# Altium PCB Driver.PcbDoc
Units mil, origin at the board's own origin, x right, y up, seen from the top; angles counter-clockwise.
Board outline 6000 x 4000 mil, 2 copper layers (Top Layer, Bottom Layer); 85 components, 67 nets, 325 pads, 0 vias.
Unrouted connection lines stored in the file: 235.
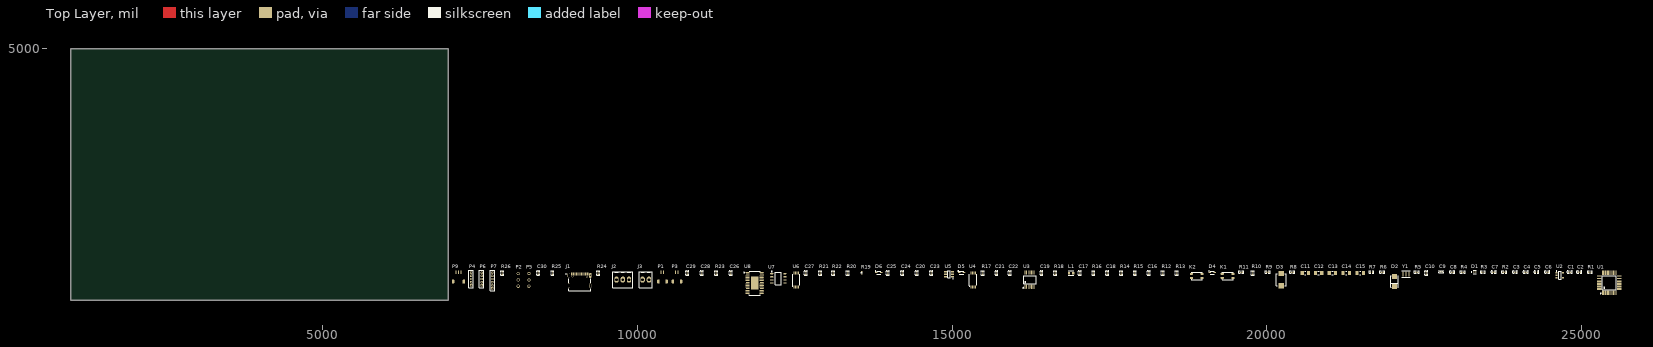
[diagram p0: Top Layer view]
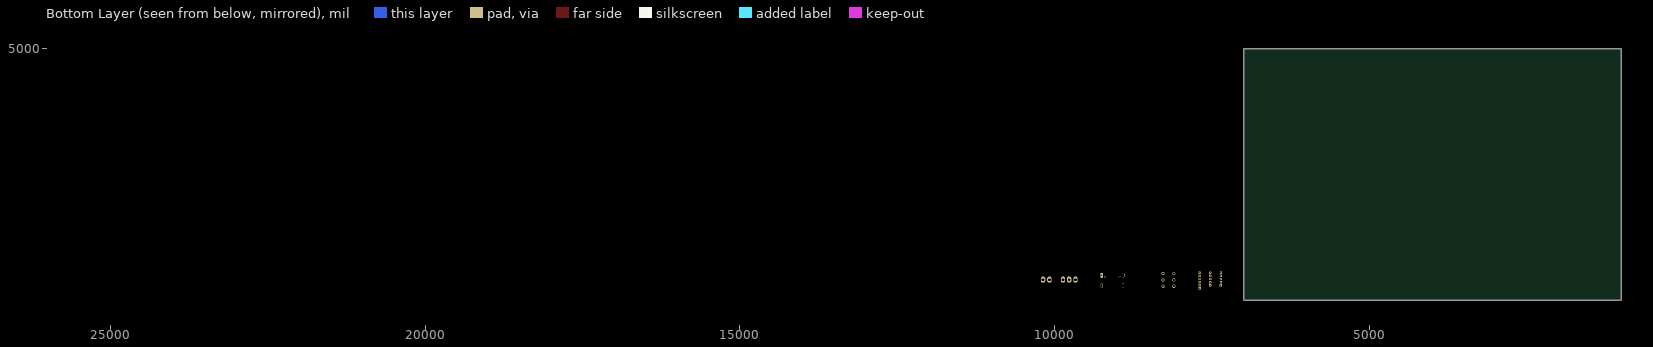
[diagram p1: Bottom Layer view, seen from below]

## Layer stack, top to bottom
Top Solder: solder mask 0.4, Solder Resist, Dk 3.5
Top Layer: signal copper 1.4
Dielectric 1: dielectric 12.6, FR-4, Dk 4.8
Bottom Layer: signal copper 1.4
Bottom Solder: solder mask 0.4, Solder Resist, Dk 3.5

## Board outline
1000,1000 7000,1000 7000,5000 1000,5000

## Design rules (kind name [scope] priority, off if disabled: settings)
Clearance [All] p1: gap=10 ignorepadtopadclearanceinfootprint=FALSE except(0: Arc-Hole Track-Hole SMDPad-Hole THPad-Hole Via-Hole Fill-Hole Poly-Hole Region-Hole Text-Hole)
PolygonConnect [All] p1: connectstyle=Relief reliefconductorwidth=10 reliefentries=4 polygonreliefangle="90 Angle" airgapwidth=10
RoomDefinition Driver [InComponentClass('Driver')] p1: confinementstyle=ConfineIn formatcopy=TRUE lockcomponents=FALSE outline 7045,1065 25640,1065 25640,1585 7045,1585
RoutingVias [All] p1: holewidth=28 width=50 viastyle="Through Hole" minholewidth=28 minwidth=50 maxholewidth=28 maxwidth=50
SolderMaskExpansion [All] p1: expansion=4 istentingtop=FALSE
Width [All] p1: maxlimit=10 minlimit=10 preferedwidth=10
30 further rules are at their usual default settings.

## Components (designator, comment, footprint, x,y, rotation, side; value= is the part's Value field where it differs from the comment)
C1 "0.1uF" 0402_C 24810,1450 r0 top
C2 "10uF" 0402_C 24960,1450 r0 top
C3 "0.1uF" 0402_C 23940,1450 r0 top
C4 "0.1uF" 0402_C 24110,1450 r0 top
C5 "0.1uF" 0402_C 24280,1450 r0 top
C6 "0.1uF" 0402_C 24450,1450 r0 top
C7 "10nF" 0402_C 23600,1450 r0 top
C8 "0.1uF" 0402_C 22940,1450 r0 top
C9 "0.047 µF" "CAP 0402_1005" 22770,1455 r0 top
C10 "10uF" 0402_C 22530,1435 r90 top
C11 "100uF" CAPC3216X190X55LL30T25 20610,1435 r0 top
C12 "100uF" CAPC3216X190X55LL30T25 20820,1435 r0 top
C13 "100uF" CAPC3216X190X55LL30T25 21040,1435 r0 top
C14 "100uF" CAPC3216X190X55LL30T25 21260,1435 r0 top
C15 "100uF" CAPC3216X190X55LL30T25 21480,1435 r0 top
C16 "0.1uF" 0402_C 18125,1435 r90 top
C17 "100pF" 0402_C 17025,1435 r90 top
C18 "0.1uF" 0402_C 17465,1435 r90 top
C19 "0.1uF" 0402_C 16420,1435 r90 top
C20 "0.1uF" 0402_C 14440,1435 r90 top
C21 "0.1uF" 0402_C 15705,1435 r90 top
C22 "10uF" 0402_C 15915,1435 r90 top
C23 "10uF" 0402_C 14670,1435 r90 top
C24 "10uF" 0402_C 14210,1435 r90 top
C25 "10uF" 0402_C 13980,1435 r90 top
C26 "0.1uF" 0402_C 11485,1435 r90 top
C27 "10uF" 0402_C 12675,1435 r90 top
C28 "0.1uF" 0402_C 11025,1435 r90 top
C29 "10nF" 0402_C 10795,1435 r90 top
C30 "470nF" 0402_C 8425,1435 r90 top
D1 "" FP-APHHS1005CGCK-MFG 23300,1450 r0 top
D2 "SS54" SMA(DO-214AC)_S1 22025,1300 r90 top
D3 "SMBJ28CA" FP-SMBJ-CA-MFG 20225,1330 r90 top
D4 "B5819WS-TP" FP-SOD-323-IPC_C 19130,1440 r0 top
D5 "B5819WS-TP" FP-SOD-323-IPC_C 15150,1440 r0 top
D6 "B5819WS-TP" FP-SOD-323-IPC_C 13835,1440 r0 top
J1 "CSP-USC16-TR" VALCON_CSP-USC16-TR 9085,1420 r0 top
J2 "282834-3" "TE 282834-3" 9770,1330 r0 top
J3 "282834-2" "TE 282834-2" 10135,1330 r0 top
K1 "TACT 4P" ButtonTACT_3.5*3.55_90 19375,1390 r0 top value=3.4x3.5
K2 "TACT 4P" ButtonTACT_3.5*3.55_90 18885,1390 r0 top value=3.4x3.5
L1 "6.8uH" FP-LQH2MCN_52-MFG 16890,1435 r0 top
P1 "SH1.0-2P" SH1.0-2P 10400,1445 r0 top
P2 "HDR1x3_2.54" HDR1X3_2.54_180 8110,1425 r0 top
P3 "SH1.0-2P" SH1.0-2P 10630,1445 r0 top
P4 "MHDR1X5" MHDR1X5 7360,1240 r90 top
P5 "HDR1x3_2.54" HDR1X3_2.54_180 8280,1425 r0 top
P6 "MHDR1X5" MHDR1X5 7530,1240 r90 top
P7 "MHDR1X6" MHDR1X6 7700,1190 r90 top
P9 "SH1.0-3P" SH1.0-3P 7160,1445 r0 top
R1 "3.3K" 0402_R 25130,1450 r0 top
R2 "3.3K" 0402_R 23770,1450 r0 top
R3 "3.3K" 0402_R 23430,1450 r0 top
R4 "2K" 0402_R 23110,1450 r0 top
R5 "0R" 0402_R 22380,1450 r0 top
R6 "22R" 0402_R 21830,1450 r0 top
R7 "0R" 0402_R 21660,1450 r0 top
R8 "22R" 0402_R 20400,1450 r0 top
R9 "0R" 0402_R 20010,1450 r0 top
R10 "1.5K" 0402_R 19775,1435 r90 top
R11 "10K" 0402_R 19590,1450 r0 top
R12 "4.7K" 0402_R 18345,1435 r90 top
R13 "4.7K" 0402_R 18565,1435 r90 top
R14 "4.7K" 0402_R 17685,1435 r90 top
R15 "4.7K" 0402_R 17905,1435 r90 top
R16 "10K" 0402_R 17245,1435 r90 top
R17 "1.8K" 0402_R 15485,1435 r90 top
R18 "0.01R" 0402_R 16640,1435 r90 top
R19 "NCP15XH103F03RC" RES_0402 13565,1440 r90 top value=10k
R20 "1M" 0402_R 13345,1435 r90 top
R21 "3.3K" 0402_R 12905,1435 r90 top
R22 "0.01R" 0402_R 13115,1435 r90 top
R23 "120R/NC" 0402_R 11255,1435 r90 top
R24 "10K" 0402_R 9380,1435 r90 top
R25 "5.1K" 0402_R 8655,1435 r90 top
R26 "5.1K" 0402_R 7855,1435 r90 top
U1 "STM32F103CBT6" LQFP-48_7x7x05P 25435,1280 r0 top
U2 "LP2992IM5-3.3/NOPB" DBV0005A_L 24650,1400 r0 top
U3 "AS5048A" TSSOP-14 16235,1330 r0 top
U4 "INA240A2PWR" "SOP65 P640X120-8N" 15335,1325 r90 top
U5 "ME3116AM6G" SOT-23-6 14950,1415 r0 top
U6 "INA240A2PWR" "SOP65 P640X120-8N" 12525,1325 r90 top
U7 "SN65HVD232D" SO-8 12240,1350 r0 top
U8 "DRV8313PWPR" FP-PWP0028C-IPC_B 11865,1275 r0 top
Y1 "8MHz" FP-CSTNE8M00GH5C000R0-MFG 22210,1420 r0 top

## Footprints (in the part's own frame and the unit in brackets; to place one, negate y for a bottom-side part, rotate by r counter-clockwise, add the part's x,y. Pads: shape width x height; smd on the part's side, far side on the other; paste and mask are expansions set on the pad)
0402_C [mm]
  rect 0.6x0.65 smd mask+0.051: 1(-0.425,0) 2(0.425,0)
  silkscreen extent -0.97,-0.58 0.97,0.58, body extent -0.48,-0.3 0.52,0.3, height 0.2
0402_R [mm]
  rect 0.6x0.65 smd mask+0.051: 1(-0.425,0) 2(0.425,0)
  silkscreen extent -0.97,-0.58 0.97,0.58, body extent -0.57,-0.27 0.58,0.28, height 0.41
ButtonTACT_3.5*3.55_90 [mil]
  rrect50% 50x30 smd: 1(-85,32) 2(-85,-32) 3(85,32) 4(85,-32)
  silkscreen extent -91,-59 91,59, body extent -90,-55 91,85, height 56
"CAP 0402_1005" [mm] "Chip Capacitor, 2-Leads, Body 1.02x0.51mm, IPC Medium Density"
  rect 0.6x0.64 smd: 1(-0.44,0) 2(0.44,0)
  silkscreen extent -1,-0.5 1,0.5, body extent -0.5,-0.26 0.5,0.26, height 0.52
CAPC3216X190X55LL30T25 [mm] "Chip Capacitor, 2-Leads, Body 3.5x1.9mm, IPC High Density"
  rect 1.25x1.8 smd: 1(-1.275,0) 2(1.275,0)
  silkscreen extent -0.25,-0.8 0.25,0.8, body extent -1.75,-0.95 1.75,0.95, height 1.9
DBV0005A_L [mm] "SOT23, 5-Leads, Body 3.05x1.75mm, Pitch 0.95mm, IPC High Density"
  rrect18% 0.8x0.55 smd: 1(-1.275,0.95) 2(-1.275,0) 3(-1.275,-0.95) 4(1.275,-0.95) 5(1.275,0.95)
  silkscreen extent -1.4,-1.55 0.5,1.9, body extent -1.42,-1.46 1.42,1.46, height 1.08
FP-APHHS1005CGCK-MFG [mm]
  rect 0.7x0.5 smd paste+0 mask+0: 1(-0.45,0) 2(0.45,0)
  silkscreen extent -1.47,-0.63 0.55,0.65, body extent -0.9,-0.4 0.9,0.4, height 0.25
FP-CSTNE8M00GH5C000R0-MFG [mm]
  rect 0.4x1.9 smd paste+0 mask+0: 1(1.2,0) 2(0,0) 3(-1.2,0)
  silkscreen extent -1.68,-1.35 1.68,1.35, body extent -1.78,-1.05 1.78,1.05, height 0.25
FP-LQH2MCN_52-MFG [mm]
  rect 0.9x1 smd paste+0 mask+0: 1(-0.85,0) 2(0.85,0)
  silkscreen extent -1.1,-0.9 1.1,0.9, body extent -1.4,-1 1.4,1, height 0.25
FP-PWP0028C-IPC_B [mm]
  rect 1.655x0.381 smd paste+0 mask+0: 1(-2.825,4.225)
  rrect100% 1.655x0.381 smd paste+0 mask+0: 2(-2.825,3.575) 3(-2.825,2.925) 4(-2.825,2.275) 5(-2.825,1.625) 6(-2.825,0.975) 7(-2.825,0.325) 8(-2.825,-0.325) 9(-2.825,-0.975) 10(-2.825,-1.625) 11(-2.825,-2.275) 12(-2.825,-2.925) 13(-2.825,-3.575) 14(-2.825,-4.225) 15(2.825,-4.225) 16(2.825,-3.575) 17(2.825,-2.925) 18(2.825,-2.275) 19(2.825,-1.625) 20(2.825,-0.975) 21(2.825,-0.325) 22(2.825,0.325) 23(2.825,0.975) 24(2.825,1.625) 25(2.825,2.275) 26(2.825,2.925) 27(2.825,3.575) 28(2.825,4.225)
  rect 3.1x5.18 smd paste-1000 mask+0: 29(0,0)
  silkscreen extent -4.35,-4.85 2.2,4.85, body extent -3.9,-5.1 3.9,5.1, height 0.25
FP-SMBJ-CA-MFG [mm]
  rect 2.16x2.26 smd paste+0 mask+0: 1(-2.45,0) 2(2.45,0)
  silkscreen extent -2.37,-1.97 2.37,1.97, body extent -3.63,-2.07 3.63,2.07, height 0.25
FP-SOD-323-IPC_C [mil]
  rect 41.54x17.16 smd paste+0 mask+0: 1(-38.41,0)
  rrect100% 41.54x17.16 smd paste+0 mask+0: 2(38.41,0)
  silkscreen extent -57,-26 33,33, body extent -63,-29 63,29, height 10
HDR1X3_2.54_180 [mil]
  round 50 hole 32: 1(0,0) 2(0,-100) 3(0,-200)
  body extent -49,-250 49,50, height 323
LQFP-48_7x7x05P [mm]
  oval 0.28x1.8 smd mask+0.051: 1(-2.75,-4.05) 2(-2.25,-4.05) 3(-1.75,-4.05) 4(-1.25,-4.05) 5(-0.75,-4.05) 6(-0.25,-4.05) 7(0.25,-4.05) 8(0.75,-4.05) 9(1.25,-4.05) 10(1.75,-4.05) 11(2.25,-4.05) 12(2.75,-4.05) 25(2.75,4.05) 26(2.25,4.05) 27(1.75,4.05) 28(1.25,4.05) 29(0.75,4.05) 30(0.25,4.05) 31(-0.25,4.05) 32(-0.75,4.05) 33(-1.25,4.05) 34(-1.75,4.05) 35(-2.25,4.05) 36(-2.75,4.05)
  oval 1.8x0.28 smd mask+0.051: 13(4.05,-2.75) 14(4.05,-2.25) 15(4.05,-1.75) 16(4.05,-1.25) 17(4.05,-0.75) 18(4.05,-0.25) 19(4.05,0.25) 20(4.05,0.75) 21(4.05,1.25) 22(4.05,1.75) 23(4.05,2.25) 24(4.05,2.75) 37(-4.05,2.75) 38(-4.05,2.25) 39(-4.05,1.75) 40(-4.05,1.25) 41(-4.05,0.75) 42(-4.05,0.25) 43(-4.05,-0.25) 44(-4.05,-0.75) 45(-4.05,-1.25) 46(-4.05,-1.75) 47(-4.05,-2.25) 48(-4.05,-2.75)
  silkscreen extent -3.6,-4.42 2.75,2.75, body extent -4.5,-4.5 4.5,4.5, height 1.6
MHDR1X5 [mm] "Connector; Header; 5 Position"
  rect 1x1 hole 0.6: 1(0,0)
  round 1 hole 0.6: 2(1.27,0) 3(2.54,0) 4(3.81,0) 5(5.08,0)
  silkscreen extent -0.9,-0.9 5.98,0.9
MHDR1X6 [mm] "Connector; Header; 6 Position"
  rect 1x1 hole 0.6: 1(0,0)
  round 1 hole 0.6: 2(1.27,0) 3(2.54,0) 4(3.81,0) 5(5.08,0) 6(6.35,0)
  silkscreen extent -0.9,-0.9 7.25,0.9
RES_0402 [mil]
  rrect50% 20x20 smd: 1(-20,0) 2(20,0)
  silkscreen extent -7,-10 7,10, body extent -20,-10 20,10, height 14
SH1.0-2P [mm]
  rrect50% 0.4x1.5 smd: 1(-0.5,0) 2(0.5,0)
  rrect50% 1x1.5 smd: SH1(-1.651,-3.683) SH2(1.651,-3.683)
  body extent -2,-4.42 2,0.54, height 3.06
SH1.0-3P [mm]
  rrect50% 0.4x1.5 smd: 1(-1,0) 2(0,0) 3(1,0)
  rrect50% 1x1.5 smd: SH1(-2.159,-3.683) SH2(2.159,-3.683)
  body extent -2.5,-4.42 2.5,0.54, height 3.06
SMA(DO-214AC)_S1 [mm]
  rect 2x2 smd: 1(2.1,0) 2(-2.1,0)
  silkscreen extent -2.35,-1.5 2.35,1.5, body extent -2.6,-1.3 2.6,1.3, height 2.4
SO-8 [mm]
  oval 1.3x0.5 smd: 1(-2.65,1.905) 2(-2.65,0.635) 3(-2.65,-0.635) 4(-2.65,-1.905) 5(2.65,-1.905) 6(2.65,-0.635) 7(2.65,0.635) 8(2.65,1.905)
  silkscreen extent -2.77,-2.5 1.2,2.93, body extent -2.89,-2.44 2.89,2.46, height 1.45
"SOP65 P640X120-8N" [mm]
  rrect25% 1.27x0.381 smd: 1(-2.87,0.975) 2(-2.87,0.325) 3(-2.87,-0.325) 4(-2.87,-0.975) 5(2.87,-0.975) 6(2.87,-0.325) 7(2.87,0.325) 8(2.87,0.975)
  silkscreen extent -2.64,-1.5 2.2,1.62, body extent -3.2,-1.5 3.2,1.5, height 1.2
SOT-23-6 [mm]
  rect 1.1x0.6 smd: 1(1.4,-0.95) 2(1.4,0) 3(1.4,0.95) 4(-1.4,0.95) 5(-1.4,0) 6(-1.4,-0.95)
  silkscreen extent -0.5,-1.87 1.73,1.4, body extent -1.4,-1.4 1.4,1.5, height 1.18
"TE 282834-2" [mm]
  oval 1.75x2.5 hole 1.1: 1(-1.27,0) 2(1.27,0)
  silkscreen extent -2.7,-3.2 2.7,3.2, body extent -2.77,-3.25 2.77,3.25, height 10
"TE 282834-3" [mm]
  oval 1.75x2.5 hole 1.1: 1(-2.54,0) 2(0,0) 3(2.54,0)
  silkscreen extent -3.97,-3.2 3.97,3.2, body extent -4.04,-3.25 4.04,3.25, height 10
TSSOP-14 [mm]
  oval 0.32x1.7 smd: 1(-1.95,-2.85) 2(-1.3,-2.85) 3(-0.65,-2.85) 4(0,-2.85) 5(0.65,-2.85) 6(1.3,-2.85) 7(1.95,-2.85) 8(1.95,2.85) 9(1.3,2.85) 10(0.65,2.85) 11(0,2.85) 12(-0.65,2.85) 13(-1.3,2.85) 14(-1.95,2.85)
  silkscreen extent -2.85,-3.45 2.55,1.6, body extent -2.5,-3.2 2.5,3.2, height 1.2
VALCON_CSP-USC16-TR [mm]
  rect 0.3x1.14 smd: A1(-3.35,0) A4(-2.55,0) A5(-1.25,0) A6(-0.25,0) A7(0.25,0) A8(1.25,0) A9(2.55,0) A12(3.35,0) B1(3.05,0) B4(2.25,0) B5(1.75,0) B6(0.75,0) B7(-0.75,0) B8(-1.75,0) B9(-2.25,0) B12(-3.05,0)
  oval 1x2 hole 0.65 slot 1.72 at 90 deg: S1(-4.325,-0.59)
  oval 1x2 hole 0.65: S2(4.325,-0.59)
  oval 0.9x1.8 hole 0.65 slot 1.4 at 90 deg: S3(-4.325,-4.77) S4(4.325,-4.77)
  round 0.65 hole 0.65 unplated: ""(-2.89,-1.07) ""(2.89,-1.07)
  silkscreen extent -5.67,-6.86 4.47,0.1, body extent -4.47,-6.28 4.47,1.47, height 3.26

## Part data
C1 C2 C3 C4 C5 C6 C7 C8 C10 C16 C18 C19 C20 C21 C22 C23 C24 C25 C26 C27 C28: library part "0402 100nF (104) 10% 16V", "贴片电容", Package=0402, SuppliersPartNumber=C1525, ComponentLink1Description=供应商链接, ComponentLink1URL=http://www.szlcsc.com/product/details_1877.html, Supplier=LC
C9: library part C0402C473K3REC7867, "CAP CER 0402 47NF 25V X7R 10%", Device Package="0402 (1005 Metric)", manufacturer=KEMET, Operating Temperature="-55°C ~ 125°C", Supplier Part Number 1=399-C0402C473K3REC7867CT-ND, Temperature Coefficient=X7R, Tolerance=±10%, Voltage - Rated=25V, Applications="ESD Protection", Capacitance="0.047 µF", ComponentLink1Description=Datasheet, ComponentLink1URL=https://api.kemet.com/component-edge/download/datasheet/C0402C473K3REC7867.pdf, componentlink2description="DigiKey Link", componentlink2url=https://www.digikey.com/en/products/detail/kemet/C0402C473K3REC7867/8643594, lastupdated="2022/8/26 11:23:32", Lifecycle Status=Active, Minimum Order=1, Mounting Type="Surface Mount, MLCC", Package / Case="0402 (1005 Metric)", packaging=TapeAndReel, Part Number=C0402C473K3REC7867, Part Status=Active, partid=33555, price=0.01, series="ESD SMD Comm X7R", Size / Dimension="0.039\" L x 0.020\" W (1.00mm x 0.50mm)", Supplier 1=DigiKey, Thickness (Max)="0.022\" (0.55mm)"
C11 C12 C13 C14 C15: library part CMP-1662-00011-2, "Chip Capacitor, 100 uF, +/- 20%, 6.3 V, -55 to 85 degC, 1206 (3216 Metric), RoHS, Tape and Reel", Capacitance="100 uF", Case Code (Imperial)=1206, Case Code (Metric)=3216, Max Operating Temperature="85 degC", Min Operating Temperature="-55 degC", Package Quantity=2000, PartNumber=GRM31CR60J107ME39L, Tolerance=20%, Type (Capacitors)=X5R, Voltage Rating="6.3 V", Case\/Package=1206, ComponentLink1Description="Manufacturer URL", ComponentLink1URL=http://www.murata.com/, componentlink2description=Datasheet, componentlink2url=http://psearch.en.murata.com/capacitor/product/GRM31CR60J107ME39%23.pdf, DatasheetVersion=09/2016, Height="1.6 mm", Length="3.2 mm", Mount="Surface Mount", Mounting Technology="Surface Mount", PackageDescription="2-Pin Surface Mount Device, Body 3.2 x 1.6 mm", PackageReference=1206, packaging="Tape and Reel", Pins=2, Radiation Hardening=No, REACH SVHC="No SVHC", RoHSCompliant=true, Voltage Rating (DC)="6.3 V", Width="1.6 mm"
C17: library part "0402 100pF (101) 5% 50V", "贴片电容", Package=0402, SuppliersPartNumber=C1546, ComponentLink1Description=供应商链接, ComponentLink1URL=http://www.szlcsc.com/product/details_1898.html, Supplier=LC
C29: library part "0402 10nF (103) 10% 50V", "贴片电容", Package=0402, SuppliersPartNumber=C15195, ComponentLink1Description=供应商链接, ComponentLink1URL=http://www.szlcsc.com/product/details_15869.html, Supplier=LC
C30: library part "0402 470nF (474) 10% 10V", "贴片电容", Package=0402, SuppliersPartNumber=C47339, ComponentLink1Description=供应商链接, ComponentLink1URL=http://www.szlcsc.com/product/details_48344.html, Supplier=LC
D1: library part CMP-44529-000044-1, "LED GREEN CLEAR CHIP SMD", Case Code (Imperial)=0402, Case Code (Metric)=1005, Color=Green, Forward Current=20mA, Forward Voltage=2.1V, Lens Color=Clear, Max Operating Temperature=85°C, Min Operating Temperature=-40°C, Package Quantity=2000, Case/Package=0402, Dominant Wavelength=570nm, Height=0.6mm, Illumination Color=Green, Lead Free="Lead Free", Length=1mm, Lens Style=Clear, Luminous Intensity=50mcd, Mount="Surface Mount", Number of LEDs=1, Number of Pins=2, packaging="Tape and Reel", Test Current=20mA, Viewing Angle=120°, Wavelength=570nm, Width=0.5mm
D2: library part "SMA(DO-214AC) SS54", "二极管", Package=SMA(DO-214AC), SuppliersPartNumber=C22452, ComponentLink1Description=供应商链接, ComponentLink1URL=http://www.szlcsc.com/product/details_23178.html, Supplier=LC
D3: library part CMP-08607-000057-1, "TVS DIODE 28V 45.4V DO214AA", Breakdown Voltage=31.1V, Clamping Voltage=45.4V, manufacturer="Littelfuse Inc", Max Junction Temp=+150°C, Package=SMBJ-CA, Peak Pulse Current=13.3A, Peak Pulse Power=600W, Reverse Standoff Voltage=28V, Temperature="-65°C to +150°C", Temperature Range Low=-65°C, Automotive=No, Category=Diode, componentlink2description=Datasheet, componentlink2url=https://www.littelfuse.com/~/media/electronics/datasheets/tvs_diodes/littelfuse_tvs_diode_smbj_datasheet.pdf.pdf, Device Class L1="Circuit Protection", Device Class L2="TVS Diodes", Device Class L3=unset, Digikey Description="TVS DIODE 28V 45.4V DO214AA", Direction=Bidirectional, Height=2.61mm, Lead Free=Yes, Manufacturer Part Number=SMBJ28CA, Mouser Description="In a Pack of 10, Littelfuse SMBJ28CA, Bi-Directional TVS Diode, 600W, 2-Pin DO-214AA", Number Of Channels=1, Octopart=https://octopart.com/smbj28ca-littelfuse-350757, RoHS=TRUE, Temperature Range High=+150°C
D4 D5 D6: library part CMP-56206-000009-1, "DIODE SCHOTTKY 40V 1A SOD323", Average Rectified Current=1A, Forward Voltage=900mV, Max Operating Temperature=125°C, Max Reverse Leakage Current=1mA, Max Reverse Voltage (DC)=40V, Max Surge Current=10A, Min Operating Temperature=-65°C, Package Quantity=1, Element Configuration=Single, Lead Free="Lead Free", Mount="Surface Mount", Number of Pins=2, packaging="Tape and Reel", Peak Non-Repetitive Surge Current=10A, Radiation Hardening=No, RoHS Compliant=Yes, series=-
J1: "CSP-USC16-TR Valcon USB Type C Surface Mount PCB Socket", Package=None, Availability="No availability data", Check_prices=https://www.snapeda.com/parts/CSP-USC16-TR/Valcon/view-part/4783629/?ref=eda, MF=Valcon, MP=CSP-USC16-TR, price=None, Purchase-URL=https://pricing.snapeda.com/search/part/CSP-USC16-TR/?ref=eda, SnapEDA_Link=https://www.snapeda.com/parts/CSP-USC16-TR/Valcon/view-part/4783629/?ref=snap
J2: "TERM BLK 3P SIDE ENT 2.54MM PCB", Color=Green, Current=10A, manufacturer="TE Connectivity AMP Connectors", Supplier Part Number 1=A98334-ND, Voltage=150V, ComponentLink1Description=Datasheet, ComponentLink1URL=https://www.te.com/commerce/DocumentDelivery/DDEController?Action=srchrtrv&DocNm=282834&DocType=Customer+Drawing&DocLang=English, componentlink2description="DigiKey Link", componentlink2url=http://digikey.com/product-detail/en/te-connectivity-amp-connectors/282834-3/A98334-ND/1153264, lastupdated="2020/1/15 4:15:50", Lifecycle Status=Active, Mating Orientation="Horizontal with Board", Minimum Order=1, Mounting Type="Through Hole", Number of Levels=1, packaging=Bulk, Part Number=282834-3, Part Status=Active, Pitch="0.100\" (2.54mm)", Positions Per Level=3, price=2.01, series=Buchanan, Supplier 1=DigiKey, Wire Gauge="16-30 AWG", Wire Termination="Screw - Rising Cage Clamp"
J3: "TERM BLK 2P SIDE ENT 2.54MM PCB", Color=Green, Current=10A, manufacturer="TE Connectivity AMP Connectors", Supplier Part Number 1=A98333-ND, Voltage=150V, ComponentLink1Description=Datasheet, ComponentLink1URL=https://www.te.com/commerce/DocumentDelivery/DDEController?Action=srchrtrv&DocNm=282834&DocType=Customer+Drawing&DocLang=English, componentlink2description="DigiKey Link", componentlink2url=http://digikey.com/product-detail/en/te-connectivity-amp-connectors/282834-2/A98333-ND/1150135, lastupdated="2020/1/15 4:15:38", Lifecycle Status=Active, Mating Orientation="Horizontal with Board", Minimum Order=1, Mounting Type="Through Hole", Number of Levels=1, packaging=Bulk, Part Number=282834-2, Part Status=Active, Pitch="0.100\" (2.54mm)", Positions Per Level=2, price=0.88, series=Buchanan, Supplier 1=DigiKey, Wire Gauge="16-30 AWG", Wire Termination="Screw - Rising Cage Clamp"
K1 K2: library part ButtonTACT, "Button", type="TACT 4P"
L1: library part CMP-06042-015166-1, "Wire Wound Ferrite Inductor for Power Lines 6.8μH ±20% 1.6Ω 285mA 0806", Case Code (Imperial)=0806, Case Code (Metric)=2016, Current Rating=285mA, DC Resistance (DCR)=1.6R, Max Operating Temperature=85°C, Min Operating Temperature=-40°C, Package Quantity=3000, Resistor Type=Wirewound, Self Resonant Frequency=65MHz, Test Frequency=1MHz, Tolerance=20%, Case/Package=0806, Core Material=Ferrite, DC Current=285mA, Depth=1.8mm, Height=0.9mm, Height - Seated (Max)=0.037inch, Inductance=6.8uH, Length=2mm, Max DC Current=285mA, Military Standard=Not, Mount="Surface Mount", packaging="Tape and Reel", Radiation Hardening=No, Shielding=Unshielded, Termination=SMD/SMT, Weight=0.000317oz, Width=0.063inch
P2 P5 P9: "Header"
P4 P6: "Header, 5-Pin", LatestRevisionDate=17-Jul-2002, LatestRevisionNote="Re-released for DXP Platform.", Publisher="Altium Limited"
P7: "Header, 6-Pin", LatestRevisionDate=17-Jul-2002, LatestRevisionNote="Re-released for DXP Platform.", Publisher="Altium Limited"
R1 R2 R3 R21: library part "0402 3.3KΩ (3301) 1%", "贴片电阻", Package=0402, SuppliersPartNumber=C25890, ComponentLink1Description=供应商链接, ComponentLink1URL=http://www.szlcsc.com/product/details_26633.html, Supplier=LC
R4 R20: library part "0402 2KΩ (2001) 1%", "贴片电阻", Package=0402, SuppliersPartNumber=C4109, ComponentLink1Description=供应商链接, ComponentLink1URL=http://www.szlcsc.com/product/details_4516.html, Supplier=LC
R5 R7 R9: library part "0402 0Ω (0R0) 1%", "贴片电阻", Package=0402, SuppliersPartNumber=C17168, ComponentLink1Description=供应商链接, ComponentLink1URL=http://www.szlcsc.com/product/details_17853.html, Supplier=LC
R6 R8 R18 R22: library part "0402 22Ω (22R0) 1%", "贴片电阻", Package=0402, SuppliersPartNumber=C25092, ComponentLink1Description=供应商链接, ComponentLink1URL=http://www.szlcsc.com/product/details_25835.html, Supplier=LC
R10: library part "0402 1.5KΩ (1501) 1%", "贴片电阻", Package=0402, SuppliersPartNumber=C25867, ComponentLink1Description=供应商链接, ComponentLink1URL=http://www.szlcsc.com/product/details_26610.html, Supplier=LC
R11: library part "0402 10KΩ (1002) 1%", "贴片电阻", Package=0402, SuppliersPartNumber=C25744, ComponentLink1Description=供应商链接, ComponentLink1URL=http://www.szlcsc.com/product/details_26487.html, Supplier=LC
R12 R13 R14 R15: library part "0402 4.7KΩ (4701) 1%", "贴片电阻", Package=0402, SuppliersPartNumber=C25900, ComponentLink1Description=供应商链接, ComponentLink1URL=http://www.szlcsc.com/product/details_26643.html, Supplier=LC
R16 R17 R24 R25 R26: library part "0402 1.2KΩ (1201) 1%", "贴片电阻", Package=0402, SuppliersPartNumber=C25862, ComponentLink1Description=供应商链接, ComponentLink1URL=http://www.szlcsc.com/product/details_26605.html, Supplier=LC
R19: "THERMISTOR 10K OHM NTC 0402 SMD"
R23: library part "0402 120Ω (1200) 1%", "贴片电阻", Package=0402, SuppliersPartNumber=C25079, ComponentLink1Description=供应商链接, ComponentLink1URL=http://www.szlcsc.com/product/details_25822.html, Supplier=LC
U1: "ARM", Package=LQFP-48_7x7x05P, SuppliersPartNumber=C8304, ComponentLink1Description=供应商链接, ComponentLink1URL=http://www.szlcsc.com/product/details_8796.html, Supplier=LC
U2: library part CMP-0062-02175-3, "Micropower 250 mA Low-Noise Ultra Low-Dropout Regulator, 5-pin SOT-23, Pb-Free", manufacturer="Texas Instruments", PackageTopMarking=LFEB*XTT, PowerWise=N, ComponentLink1Description="Datasheet URL", ComponentLink1URL=http://www.ti.com/general/docs/lit/getliterature.tsp?genericPartNumber=LP2992&fileType=pdf, CompType="LDO IC", PackageDescription="Molded SOT-23, .115 x .063 x .040 in Body, 5 Lead, .0375 in Pitch", PackageReference=DBV0005A, PinCount=5, RoHS=Y
U3: "14 位旋转式位置传感器"
U4 U6: "-4 to 80V, bidirectional, ultra-precise current sense amplifier with enhanced PWM rejection 8-TSSOP -40 to 125", Package="TSSOP-8 Texas Instruments", Availability=Good, MF="Texas Instruments", MP=INA240A2PWR, price=None, Purchase-URL=https://pricing.snapeda.com/search/part/INA240A2PWR/?ref=eda, SnapEDA_Link=https://www.snapeda.com/parts/INA240A2PWR/Texas%20Instruments/view-part/588604/?ref=snap
U5: "DC/DC降压型稳压器"
U7: manufacturer="Texas Instruments", Manufacturer Part Number=SN65HVD232DR, Operating Temperature="-40°C ~ 85°C", Package / Case="8-SOIC (0.154\", 3.90mm Width)", Supplier Device Package=8-SOIC, Supplier Part Number 1=296-26344-2-ND, Voltage - Supply="3 V ~ 3.6 V", Category="Integrated Circuits (ICs)", ComponentLink1Description=http://www.ti.com/lit/ds/symlink/sn65hvd230.pdf, ComponentLink1URL=http://www.ti.com/lit/ds/symlink/sn65hvd230.pdf, Data Rate=1Mbps, Duplex=Half, Mounting Type="Surface Mount", Number of Drivers/Receivers=1/1, packaging="Tape & Reel (TR)", Part Status=Active, Pricing 1="2500=0.84375 (USD)", Pricing 2="1=2.05, 10=1.842, 100=1.4809, 500=1.21668, 1000=1.00811 (USD)", Protocol=CAN, RoHS="RoHS Compliant", Stock=5000, Supplier 1=Digi-Key, Supplier 2=Digi-Key, Supplier Part Number 2=296-26344-1-ND, type=Transceiver
U8: library part CMP-04915-000025-1, "IC MOTOR DRIVER 8V-60V 28HTSSOP", Case/Package=HTSSOP, Max Operating Temperature=125°C, Max Supply Voltage=60V, Min Operating Temperature=-40°C, Min Supply Voltage=8V, Output Current=1.75A, Package Quantity=2000, Interface=Parallel, Lead Free="Lead Free", Logic Function="AND GATE", Mount="Surface Mount", Number of Outputs=1, Number of Pins=28, packaging="Tape and Reel", series=-
Y1: library part CMP-06057-000001-1, "CERAMIC RES 8.0000MHZ 33PF SMD", Capacitance=33pF, Case/Package=SMD/SMT, Frequency Stability=0.13%, Frequency Tolerance=0.07%, Max Operating Temperature=125°C, Min Operating Temperature=-40°C, Resistor Type=Ceramic, Frequency=8MHz, Impedance=40R, Mount="Surface Mount", packaging="Tape and Reel"

## Nets (pads, with @x,y where several pads share a name; then routed paths per layer and width w, separated by ;. In a path a pad name is that pad's centre, name@x,y a point inside that pad or via, vN(x,y) a via of type N, cw(c..) or ccw(c..) an arc to the next point about the centre after c; other vN are vias at no path point)
5V: C17.2 C21.1 C22.2 C25.1 D1.2 D4.1 L1.2 P2.2 P5.2 P6.1 P7.2 R16.2 U2.1 U2.3 U3.11
ADC1_IN9: C27.1 R19.1 R21.2 U1.19
AGND: C8.1 C10.1 R5.2 R9.2 U1.8
AVCC: C8.2 C10.2 R7.2 R19.2 U1.9
BOOT0: C1.1 C1.2 C2.1 C2.2 C3.1 C3.2 C4.1 C4.2 C5.1 C5.2 C6.1 C6.2 C7.1 C9.1 C11.1 C12.1 C13.1 C14.1 C15.1 C16.2 C20.1 C20.2 C21.2 C22.1 C23.1 C24.1 C24.2 C25.2 C26.1 C26.2 C27.2 C30.2 D3.1 D5.2 J1.A1 J1.A12 J1.B1 J1.B12 J1.S1 J1.S2 J1.S3 J1.S4 J3.2 K1.2 K1.4 K2.2 K2.4 P2.1 P4.1 P5.1 P6.2 P7.1 P9.1 P9.SH1 P9.SH2 R1.2 R2.2 R3.2 R4.2 R5.1 R7.1 R9.1 R11.2 R12.2 R13.2 R14.2 R15.2 R17.1 R21.1 R25.2 R26.1 U1.1 U1.23 U1.35 U1.44 U1.47 U2.2 U2.5 U3.5 U3.12 U3.13 U4.4 U4.5 U4.6 U4.7 U5.2 U6.4 U6.5 U6.6 U6.7 U7.2 U7.3 U8.6 U8.7 U8.10 U8.12 U8.13 U8.14 U8.20 U8.28 U8.29 Y1.2
CAN_H: P1.2 P3.2 R23.2 U7.7
CAN_L: P1.1 P3.1 R23.1 U7.6
CAN_RX: U1.45 U7.4
CAN_TX: U1.46 U7.1
DRV_EN: U1.4 U8.22 U8.24 U8.26
DRV_FAULT: R24.1 U1.3 U8.18
ENCODER_A: P6.3 R1.1 U1.29
ENCODER_B: P6.4 R2.1 U1.30
ENCODER_Z: C9.2 P6.5 R3.1 U1.31
I2C1_SCL: R13.1 U1.42
I2C1_SDA: R15.1 U1.43
I2C2_SCL: P4.4 R12.1 U1.21
I2C2_SDA: P4.5 R14.1 U1.22
KEY: K2.1 K2.3 U1.2
MOTOR_A: J2.1 R18.2 U4.2
MOTOR_A_CS: R18.1 U4.3 U8.5
MOTOR_B: J2.2 R22.1 U6.3
MOTOR_B_CS: R22.2 U6.2 U8.8
MOTOR_C: J2.3 U8.9
NetC7_2: C7.2 U2.4
NetC17_1: C17.1 R16.1 R17.2 U5.3
NetC18_1: C18.1 C19.1 D5.1 L1.1 U5.6
NetC18_2: C18.2 C19.2 U5.1
NetC23_2: C23.2 D6.1 R20.1 U5.5
NetC28_1: C28.1 U8.3
NetC29_1: C29.1 U8.1
NetC29_2: C29.2 U8.2
NetD1_1: D1.1 R4.1
NetJ1_A5: J1.A5 R25.1
NetJ1_B5: J1.B5 R26.2
NetR20_2: R20.2 U5.4
NetU1_5: U1.5 Y1.3
NetU1_6: U1.6 Y1.1
NetU1_24: U1.24 U1.36 U1.48
NRST: C16.1 K1.1 K1.3 R11.1 U1.7
PWM_A: U1.40 U8.27
PWM_AUX1: P5.3 U1.38
PWM_AUX2: P2.3 U1.39
PWM_B: U1.41 U8.25
PWM_C: U1.18 U8.23
SENSOR_A: U1.10 U4.8
SENSOR_B: U1.11 U6.8
SPI1_CS: U1.14 U3.1
SPI1_MISO: U1.16 U3.3
SPI1_MOSI: U1.17 U3.4
SPI1_SCK: U1.15 U3.2
SPI2_CS: P7.3 U1.25
SPI2_MISO: P7.5 U1.27
SPI2_MOSI: P7.4 U1.28
SPI2_SCK: P7.6 U1.26
SWCLK: P9.2 U1.37
SWDIO: P9.3 U1.34
USART2_RX: P4.3 U1.13
USART2_TX: P4.2 U1.12
USB_DM: J1.A7 J1.B7 R6.2
USB_DM_IN: R6.1 U1.32
USB_DP: J1.A6 J1.B6 R8.2 R10.2
USB_DP_IN: R8.1 U1.33
V3P3: C30.1 R24.2 U8.15 U8.16 U8.17
VBUS: D4.2 J1.A4 J1.A9 J1.B4 J1.B9 R10.1
VCC: C11.2 C12.2 C13.2 C14.2 C15.2 C28.2 D2.2 D3.2 D6.2 U8.4 U8.11
VCC_IN: D2.1 J3.1
pads on no net: J1. J1.A8 J1.B8 P1.SH1 P1.SH2 P3.SH1 P3.SH2 U1.20 U3.6 U3.7 U3.8 U3.9 U3.10 U3.14 U4.1 U6.1 U7.5 U7.8 U8.19 U8.21

## Text inside footprints (layer, text, board x,y; h text height)
J1: Mechanical 13 "PCB Edge" at 9003.5,1160.16 h27.56